# Altium PCB sensor.PcbDoc
Units mm, origin at the board's own origin, x right, y up, seen from the top; angles counter-clockwise.
Board outline 89.99 x 89.99 mm, 2 copper layers (Top Layer, Bottom Layer); 63 components, 46 nets, 188 pads, 18 vias.
Unrouted connection lines stored in the file: 77.
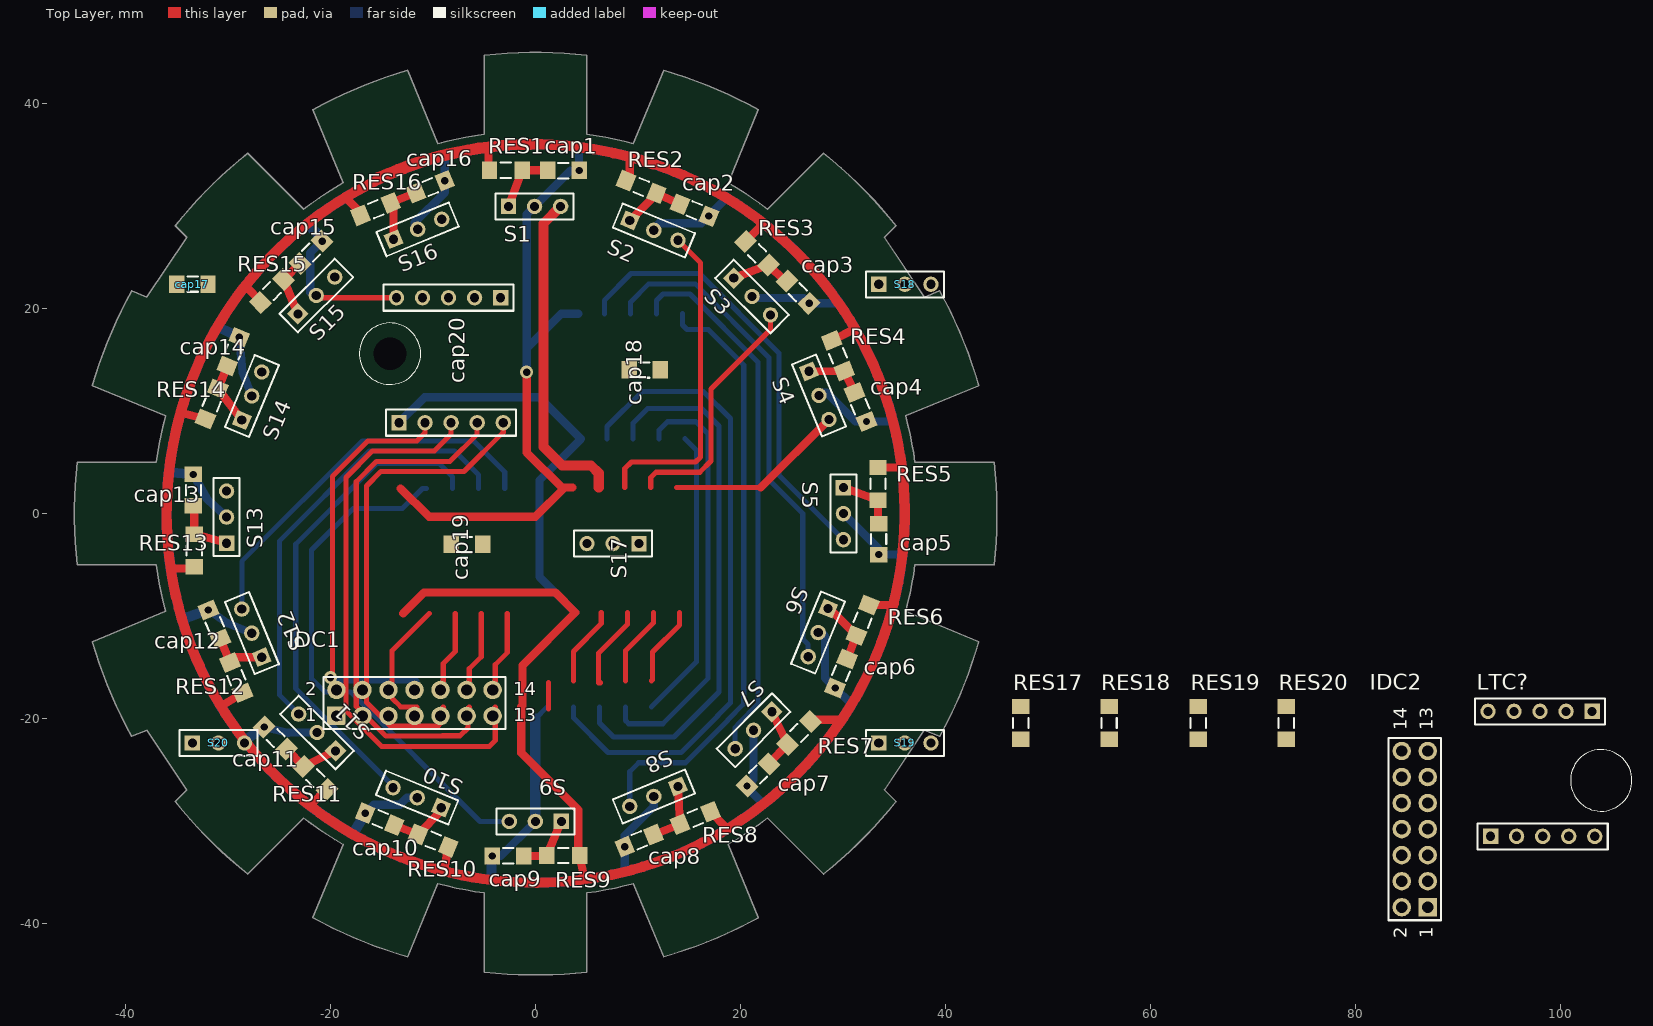
[diagram p0: Top Layer view]
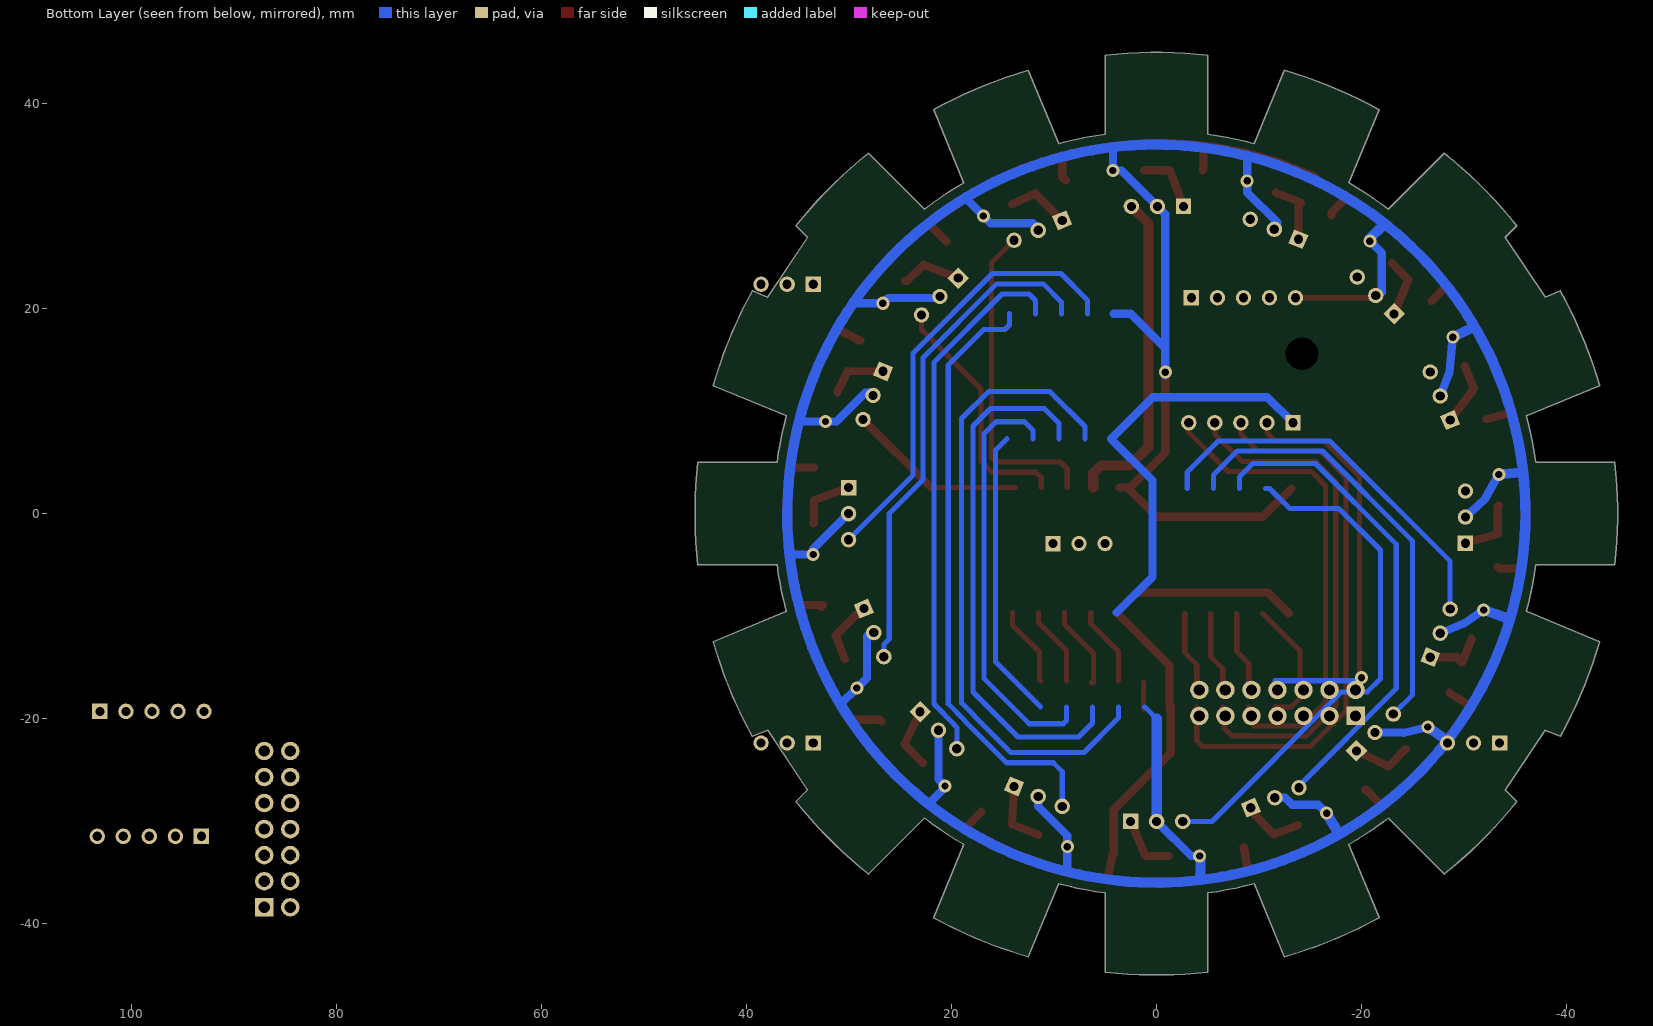
[diagram p1: Bottom Layer view, seen from below]
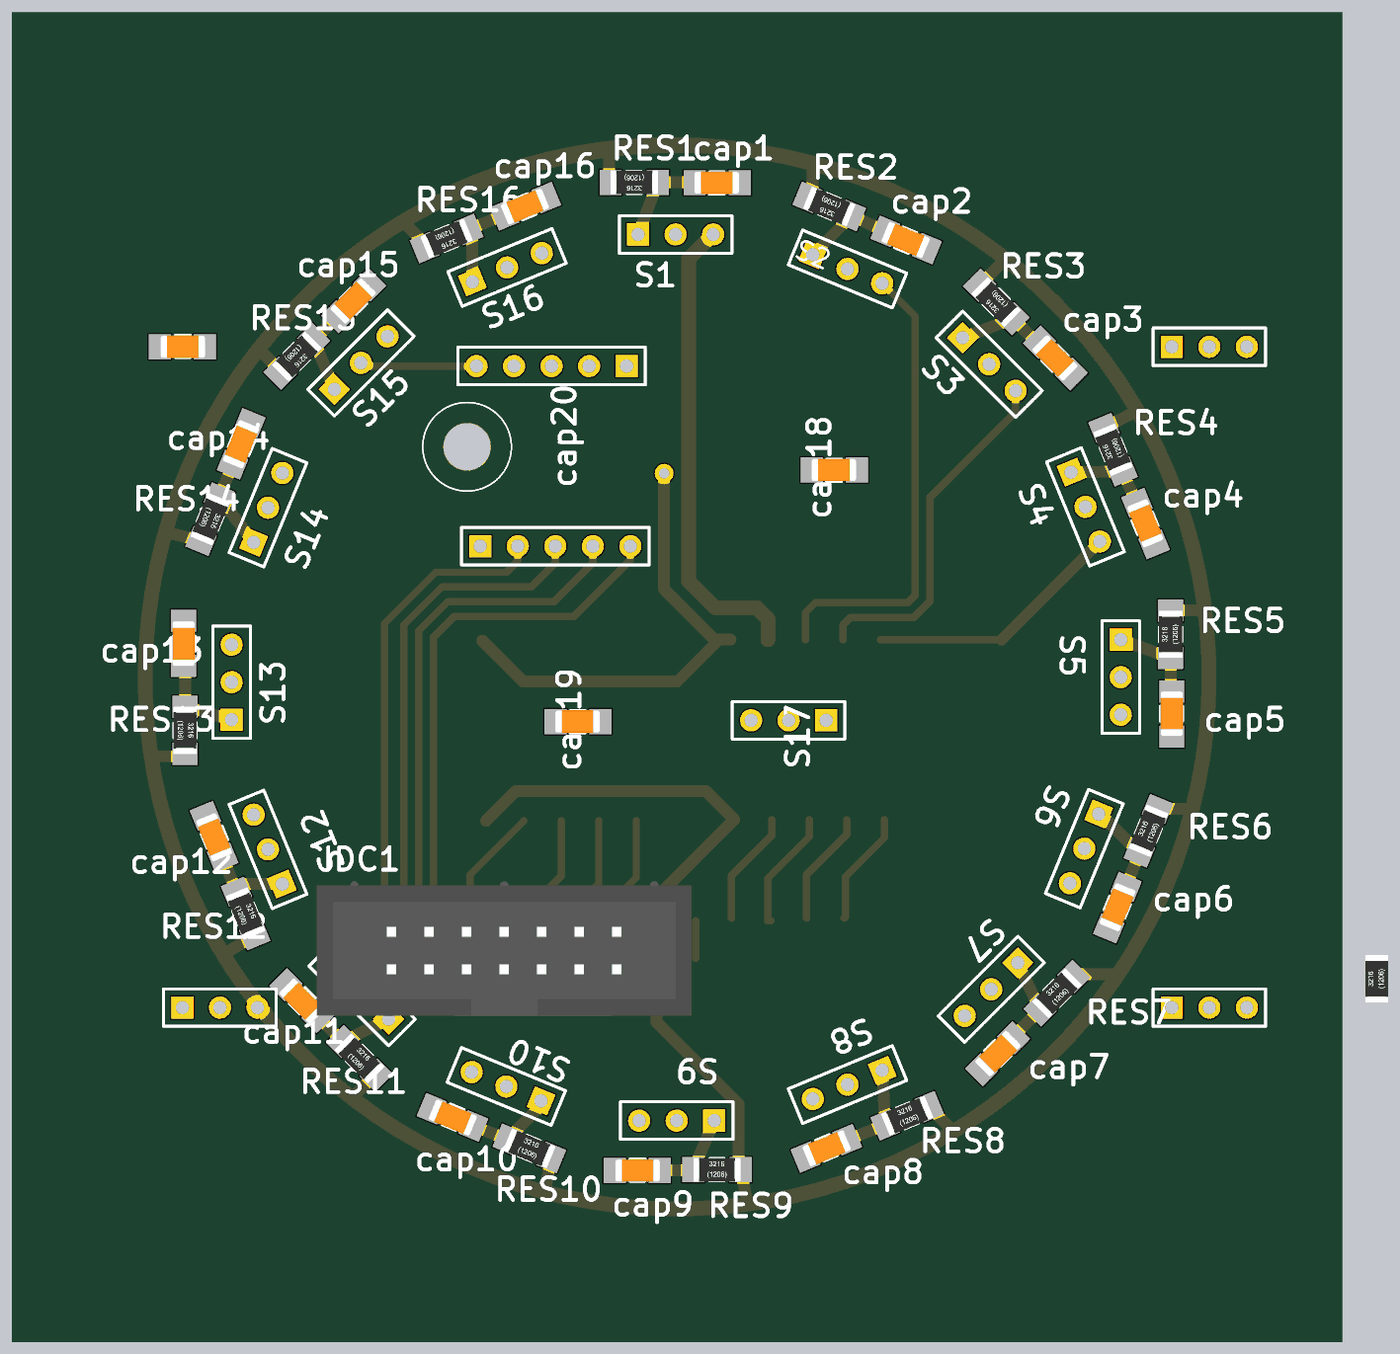
[diagram p2: 3D render of the assembled board from above, using the file's embedded part models]

## Layer stack, top to bottom
Top Solder: solder mask 0.0102, Solder Resist, Dk 3.5
Top Layer: signal copper 0.0356
Dielectric 1: dielectric 0.32, FR-4, Dk 4.8
Bottom Layer: signal copper 0.0356
Bottom Solder: solder mask 0.0102, Solder Resist, Dk 3.5

## Board outline
-34.024,-26.953 -37.922,-21.12 -39.404,-21.734 cw(c0,0) -43.231,-12.495 -36.097,-9.54 cw(c0,0) -37,-5 -44.721,-5 cw(c0,0) -44.721,5 -37,5 cw(c0,0) -36.097,9.54 -43.231,12.495 cw(c0,0) -39.404,21.734 -37.922,21.12 -34.024,26.953 -35.158,28.087 cw(c0,0) -28.087,35.158 -22.627,29.698 cw(c0,0) -18.779,32.27 -21.734,39.404 cw(c0,0) -12.495,43.231 -9.54,36.097 cw(c0,0) -5,37 -5,44.721 cw(c0,0) 5,44.721 5,37 cw(c0,0) 9.54,36.097 12.495,43.231 cw(c0,0) 21.734,39.404 18.779,32.27 cw(c0,0) 22.627,29.698 28.087,35.158 cw(c0,0) 35.158,28.087 34.024,26.953 37.922,21.12 39.404,21.734 cw(c0,0) 43.231,12.495 36.097,9.54 cw(c0,0) 37,5 44.721,5 cw(c0,0) 44.721,-5 37,-5 cw(c0,0) 36.097,-9.54 43.231,-12.495 cw(c0,0) 39.404,-21.734 37.922,-21.12 34.024,-26.953 35.158,-28.087 cw(c0,0) 28.087,-35.158 22.627,-29.698 cw(c0,0) 18.779,-32.27 21.734,-39.404 cw(c0,0) 12.495,-43.231 9.54,-36.097 cw(c0,0) 5,-37 5,-44.721 cw(c0,0) -5,-44.721 -5,-37 cw(c0,0) -9.54,-36.097 -12.495,-43.231 cw(c0,0) -21.734,-39.404 -18.779,-32.27 cw(c0,0) -22.627,-29.698 -28.087,-35.158 cw(c0,0) -35.158,-28.087

## Design rules (kind name [scope] priority, off if disabled: settings)
Clearance [All] p1: gap=0.5 ignorepadtopadclearanceinfootprint=FALSE
PolygonConnect [All] p1: connectstyle=Relief reliefconductorwidth=0.254 reliefentries=4 polygonreliefangle="90 Angle" airgapwidth=0.254
RoutingVias [All] p1: holewidth=0.711 width=1.27 viastyle="Through Hole" minholewidth=0.711 minwidth=1.27 maxholewidth=0.711 maxwidth=1.27
SolderMaskExpansion [All] p1: expansion=0.102
Width [All] p1: maxlimit=2 minlimit=0.4 preferedwidth=0.8
30 further rules are at their usual default settings.

## Components (designator, comment, footprint, x,y, rotation, side; value= is the part's Value field where it differs from the comment)
cap1 "smd" "Cap SMD" 2.718,33.477 r180 top
cap2 "smd" "Cap SMD" 15.5,29.6 r157.5 top
cap3 "smd" "Cap SMD" 25.6,21.6 r135 top
cap4 "smd" "Cap SMD" 31.7,10.4 r112.5 top
cap5 "smd" "Cap SMD" 33.479,-2.5 r90 top
cap6 "smd" "Cap SMD" 29.8,-15.6 r67.5 top
cap7 "smd" "Cap SMD" 21.7,-25.5 r45 top
cap8 "smd" "Cap SMD" 10.1,-31.9 r22.5 top
cap9 "smd" "Cap SMD" -2.7,-33.4 r0 top
cap10 "smd" "Cap SMD" -15.2,-29.8 r337.5 top
cap11 "smd" "Cap SMD" -25.4,-21.9 r315 top
cap12 "smd" "Cap SMD" -31.338,-10.8 r292.5 top
cap13 "smd" "Cap SMD" -33.4,2.3 r270 top
cap14 "smd" "Cap SMD" -29.5,15.8 r247.5 top
cap15 "smd" "Cap SMD" -21.9,25.5 r225 top
cap16 "smd" "Cap SMD" -10.269,31.884 r202.5 top
cap17 "smd" "Cap SMD" -33.479,22.37 r0 top locked
cap18 "smd" "Cap SMD" 10.643,14.031 r180 top
cap19 "smd" "Cap SMD" -6.7,-3 r180 top
cap20 "smd" "LTC TAK" -7.1,15.6 r180 top
IDC1 "IDC 2X7" "IDC 2X7" -11.557,-18.846 r0 top
IDC2 "IDC 2X7" "IDC 2X7" 86.137,-30.52 r90 top
LTC? "LTC TAK" "LTC TAK" 96.837,-26.02 r0 top
RES1 "SMD" "Resistor SMD 1206" -2.9,33.5 r180 top
RES2 "SMD" "Resistor SMD 1206" 10.3,31.872 r157.5 top
RES3 "SMD" "Resistor SMD 1206" 21.6,25.4 r135 top
RES4 "SMD" "Resistor SMD 1206" 29.5,15.4 r112.5 top
RES5 "SMD" "Resistor SMD 1206" 33.4,2.9 r90 top
RES6 "SMD" "Resistor SMD 1206" 31.9,-10.4 r67.5 top
RES7 "SMD" "Resistor SMD 1206" 25.7,-21.4 r45 top
RES8 "SMD" "Resistor SMD 1206" 15.57,-29.693 r22.5 top
RES9 "SMD" "Resistor SMD 1206" 2.7,-33.349 r0 top
RES10 "SMD" "Resistor SMD 1206" -10,-31.9 r337.5 top
RES11 "SMD" "Resistor SMD 1206" -21.5,-25.8 r315 top
RES12 "SMD" "Resistor SMD 1206" -29.2,-16 r292.5 top
RES13 "SMD" "Resistor SMD 1206" -33.3,-3.6 r270 top
RES14 "SMD" "Resistor SMD 1206" -31.6,10.7 r247.5 top
RES15 "SMD" "Resistor SMD 1206" -25.73,21.717 r225 top
RES16 "SMD" "Resistor SMD 1206" -15.6,29.698 r202.5 top
RES17 "SMD" "Resistor SMD 1206" 47.337,-20.42 r90 top
RES18 "SMD" "Resistor SMD 1206" 55.937,-20.42 r90 top
RES19 "SMD" "Resistor SMD 1206" 64.637,-20.42 r90 top
RES20 "SMD" "Resistor SMD 1206" 73.237,-20.42 r90 top
S1 "Header 3" HDR1X3 -2.642,29.972 r0 top
S2 "Header 3" HDR1X3 9.185,28.607 r337.5 top
S3 "Header 3" HDR1X3 19.32,22.98 r315 top
S4 "Header 3" HDR1X3 26.663,13.878 r292.5 top
S5 "Header 3" HDR1X3 30.023,2.54 r270 top
S6 "Header 3" HDR1X3 28.531,-9.261 r247.5 top
S7 "Header 3" HDR1X3 23.056,-19.337 r225 top
S8 "Header 3" HDR1X3 13.878,-26.612 r202.5 top
S9 "Header 3" HDR1X3 2.515,-30.023 r180 top
S10 "Header 3" HDR1X3 -9.21,-28.683 r157.5 top
S11 "Header 3" HDR1X3 -19.522,-23.15 r135 top
S12 "Header 3" HDR1X3 -26.714,-14.005 r112.5 top
S13 "Header 3" HDR1X3 -30.147,-2.88 r90 top
S14 "Header 3" HDR1X3 -28.658,9.128 r67.5 top
S15 "Header 3" HDR1X3 -23.19,19.482 r45 top
S16 "Header 3" HDR1X3 -13.853,26.765 r22.5 top
S17 "Header 3" HDR1X3 10.088,-2.921 r180 top
S18 "Header 3" HDR1X3 33.479,22.37 r0 top locked
S19 "Header 3" HDR1X3 33.479,-22.37 r0 top locked
S20 "Header 3" HDR1X3 -33.479,-22.37 r0 top locked

## Footprints (in the part's own frame and the unit in brackets; to place one, negate y for a bottom-side part, rotate by r counter-clockwise, add the part's x,y. Pads: shape width x height; smd on the part's side, far side on the other; paste and mask are expansions set on the pad)
"Cap SMD" [mm]
  rect 1.5x1.7 smd: 1(-1.525,0) 2(1.525,0)
  silkscreen extent -0.47,-0.72 0.53,0.78, body extent -1.49,-0.76 1.55,0.76, height 0.75
HDR1X3 [mm] "Connector; Header; 3 Position"
  rect 1.5x1.5 hole 0.9: 1(0,0)
  round 1.5 hole 0.9: 2(2.54,0) 3(5.08,0)
  silkscreen extent -1.27,-1.27 6.35,1.27
"IDC 2X7" [mm]
  rect 1.8x1.8 hole 1.1 unplated: 1(-7.874,-0.889)
  round 1.8 hole 1.1 unplated: 2(-7.874,1.651) 3(-5.334,-0.889) 4(-5.334,1.651) 5(-2.794,-0.889) 6(-2.794,1.651) 7(-0.254,-0.889) 8(-0.254,1.651) 9(2.286,-0.889) 10(2.286,1.651) 11(4.826,-0.889) 12(4.826,1.651) 13(7.366,-0.889) 14(7.366,1.651)
  silkscreen extent -9.14,-2.16 8.64,2.92, body extent -12.83,-4.06 12.55,5.04, height 9.3
"LTC TAK" [mm]
  rect 1.5x1.5 hole 0.9: 1(6.223,6.731) 6(-3.683,-5.461)
  round 1.5 hole 0.9: 2(3.683,6.731) 3(1.143,6.731) 4(-1.397,6.731) 5(-3.937,6.731) 7(-1.143,-5.461) 8(1.397,-5.461) 9(3.937,-5.461) 10(6.477,-5.461)
  round 1.524 hole 3.2: 2(7.112,0)
  silkscreen extent -5.21,-6.73 10.11,8
"Resistor SMD 1206" [mm]
  rect 1.5x1.7 smd: 1(-1.6,0) 2(1.6,0)
  silkscreen extent -0.5,-0.75 0.5,0.75, body extent -1.6,-0.8 1.6,0.8, height 0.55

## Part data
cap1 cap2 cap3 cap4 cap5 cap6 cap7 cap8 cap9 cap10 cap11 cap12 cap13 cap14 cap15 cap16 cap17 cap18 cap19 cap20: library part "Cap SMD"
RES1 RES2 RES3 RES4 RES5 RES6 RES7 RES8 RES9 RES10 RES11 RES12 RES13 RES14 RES15 RES16 RES17 RES18 RES19 RES20: library part "Res SMD"
S1 S2 S3 S4 S5 S6 S7 S8 S9 S10 S11 S12 S13 S14 S15 S16 S17 S18 S19 S20: "Header, 3-Pin", LatestRevisionDate=17-Jul-2002, LatestRevisionNote="Re-released for DXP Platform.", Publisher="Altium Limited"

## Via types
v1: diameter 1.27, hole 0.711, Top Layer to Bottom Layer, 18 vias

## Nets (pads, with @x,y where several pads share a name; then routed paths per layer and width w, separated by ;. In a path a pad name is that pad's centre, name@x,y a point inside that pad or via, vN(x,y) a via of type N, cw(c..) or ccw(c..) an arc to the next point about the centre after c; other vN are vias at no path point)
CR1: cap1.2 RES1.1 S1.1 | length 6.3
  Top Layer w0.8: S1.1 RES1.1 1.17,33.5 cap1.2
CR2: cap2.2 RES2.1 S2.1 | length 6.3
  Top Layer w0.8: S2.1 11.778,31.2 RES2.1 cap2.2
CR3: cap3.2 RES3.1 S3.1 | length 6.1
  Top Layer w0.8: S3.1 RES3.1 24.322,22.678 cap3.2
CR4: cap4.2 RES4.1 S4.1 | length 5.8
  Top Layer w0.8: S4.1 RES4.1 cap4.2
CR5: cap5.2 RES5.1 S5.1 | length 5.9
  Top Layer w0.8: S5.1 RES5.1 33.4,-0.896 cap5.2
CR6: cap6.2 RES6.1 S6.1 | length 6.3
  Top Layer w0.8: S6.1 28.671,-9.261 RES6.1 cap6.2
CR7: cap7.2 RES7.1 S7.1 | length 6
  Top Layer w0.8: cap7.2@22.799,-24.301 RES7.1 S7.1
CR8: cap8.2 RES8.1 S8.1 | length 6.5
  Top Layer w0.8: cap8.2 RES8.1 S8.1
CR9: cap9.2 RES9.1 S9.1 | length 5.9
  Top Layer w0.8: cap9.2 1.049,-33.4 RES9.1 S9.1
CR10: cap10.2 RES10.1 S10.1 | length 6
  Top Layer w0.8: cap10.2 RES10.1 -9.21,-29.02 S10.1
CR11: cap11.2 RES11.1 S11.1 | length 5.9
  Top Layer w0.8: cap11.2 RES11.1 S11.1
CR12: cap12.2 RES12.1 S12.1 | length 5.8
  Top Layer w0.8: cap12.2 RES12.1 -29.296,-14.005 S12.1
CR13: cap13.2 RES13.1 S13.1 | length 6.1
  Top Layer w0.8: cap13.2 -33.3,0.675 RES13.1 S13.1
CR14: cap14.2 RES14.1 S14.1 | length 6.2
  Top Layer w0.8: cap14.2 RES14.1 S14.1
CR15: cap15.2 RES15.1 S15.1 | length 5.9
  Top Layer w0.8: S15.1 RES15.1 -24.552,22.848 cap15.2
CR16: cap16.2 RES16.1 S16.1 | length 6.3
  Top Layer w0.8: S16.1 -13.853,30.042 RES16.1 cap16.2
CR17: cap17.2 RES17.1 S17.1 | length 38
  Bottom Layer w0.5: -28.658,-9.312 -28.658,-4.656 -16.902,7.1 -6.06,7.1 -3.017,4.057 -3.017,2.461
CR18: cap18.2 RES18.1 S18.1 | length 43
  Bottom Layer w0.5: -23.114,-19.558 -25,-17.672 -25,-14.738 -24.984,-14.722 -24.984,-13.289 -25,-13.273 -25,-2.7 -16.2,6.1 -7.9,6.1 -5.557,3.757 -5.557,2.461
CR19: cap19.2 RES19.1 S19.1 | length 47.9
  Bottom Layer w0.5: -13.904,-26.739 -13.904,-26.558 -23.4,-17.062 -23.4,-2.978 -15.522,4.9 -9.41,4.9 -8.097,3.587 -8.097,2.461
CR20: cap20.2 RES20.1 S20.1 | length 51.3
  Bottom Layer w0.5: -10.637,2.461 -11.039,2.461 -13,0.5 -17.8,0.5 -21.854,-3.554 -21.854,-16.105 -20.574,-17.385 -18.062,-17.385 -5.424,-30.023 -2.565,-30.023
GND: cap1.1 cap2.1 cap3.1 cap4.1 cap5.1 cap6.1 cap7.1 cap8.1 cap9.1 cap10.1 cap11.1 cap12.1 cap13.1 cap14.1 cap15.1 cap16.1 cap17.1 cap18.1 cap19.1 cap20.1 IDC1.9 IDC1.10 IDC2.9 IDC2.10 LTC?.10 S1.2 S2.2 S3.2 S4.2 S5.2 S6.2 S7.2 S8.2 S9.2 S10.2 S11.2 S12.2 S13.2 S14.2 S15.2 S16.2 S17.2 S18.2 S19.2 S20.2 | length 430.5
  Top Layer w0.5: S15.2@-21.177,21.061 -13.577,21.061
  Top Layer w0.8: S15.2 S15.2@-21.177,21.061 ; -13.177,2.461 -10.416,-0.3 0,-0.3 2.84,2.54 ; v1(-0.875,13.803) -0.875,5.975 2.56,2.54 2.84,2.54 ; 3.611,2.54 2.84,2.54
  Bottom Layer w0.5: -0.025,-20.015 1.143,-18.846
  Bottom Layer w0.8: v1(-33.4,3.825) -32.031,1.4 S13.2 ; v1(-31.922,-9.391) -30.039,-10.7 S12.2 ; v1(-28.916,17.209) -28.588,13.821 S14.2 ; v1(-26.478,-20.822) -24.1,-21.382 S11.2 ; S15.2@-21.394,21.442 -21.274,21.563 -21.989,21.563 -21.989,25.411 v1(-20.822,26.578) ; v1(-16.609,-29.216) -15.782,-28.389 -13.22,-28.389 -12.542,-27.711 S10.2 ; S16.2 -11.8,28.031 -11.8,28.402 -8.86,31.341 v1(-8.86,32.467) -8.86,34.849 -8.802,34.907 ; v1(-4.225,-33.4) -3.403,-33.4 S9.2 ; v1@-0.875,13.5 v1(-0.875,13.803) -0.875,16.125 ; 4.166,19.492 2.492,19.492 -0.875,16.125 ; 4.225,35.751 4.243,35.734 v1(4.243,33.477) 3.404,33.477 S1.2 -0.875,29.199 -0.875,16.125 ; 8.567,-34.966 8.691,-34.842 v1(8.691,-32.484) 8.691,-31.384 11.532,-28.543 S8.2 ; S2.2@11.532,27.829 12.027,28.324 16.176,28.324 v1(16.88,29.028) 18.537,30.685 18.537,30.861 ; S3.2 21.262,21.038 26.162,21.038 v1(26.678,20.522) 29.426,20.522 29.516,20.611 ; S7.2 21.26,-25.94 v1(20.622,-26.578) 20.622,-26.703 22.233,-28.314 ; S6.2 27.896,-11.608 28.237,-11.949 28.237,-16.029 v1(29.216,-17.009) 30.744,-18.537 30.861,-18.537 ; S4.2 27.913,11.809 28.391,11.809 31.209,8.991 v1(32.284,8.991) 34.852,8.991 34.862,8.981 ; S5.2 33.479,-3.456 v1(33.479,-3.994) 35.664,-3.994 35.766,-4.096
  Bottom Layer w1: -35.5,4 v1(-33.4,3.825) ; -34.162,-10.18 v1(-31.922,-9.391) ; -30.754,18.1 v1(-28.916,17.209) ; -28.2,-22 v1(-26.478,-20.822) ; -22.079,28.1 -20.822,26.843 v1(-20.822,26.578) ; -17.7,-31.1 v1(-16.609,-29.216) ; v1(-4.225,-33.4) -4.3,-33.475 -4.3,-35.742 ; S9.2 -0.025,-20.015 ; -4.3,-35.742 cw(c0,0) -8.802,34.907 cw(c0,0) 4.225,35.751 cw(c0,0) 18.537,30.861 cw(c0,0) 29.516,20.611 cw(c0,0) 34.862,8.981 cw(c0,0) 36,0 36,-1.269 35.977,-1.292 cw(c0,0) 35.766,-4.096 cw(c0,0) 30.861,-18.537 cw(c0,0) 22.233,-28.314 cw(c0,0) 8.567,-34.966 cw(c0,0) -4.3,-35.742
L17: LTC?.9 S17.3 | length 59
  Bottom Layer w0.5: 9.185,-28.556 9.185,-25.169 10.054,-24.3 14.609,-24.3 18.76,-20.149 18.76,-20.097 20.3,-18.557 20.3,14.5 16.848,17.952 14.774,17.952 14.326,18.4 14.326,19.492
L18: LTC?.8 S18.3 | length 52.9
  Bottom Layer w0.5: 11.786,19.492 11.786,20.786 12.414,21.414 15.063,21.414 21.704,14.773 21.704,-18.568 19.76,-20.511 19.76,-20.564 19.464,-20.86 19.464,-22.929
L19: LTC?.7 S19.3 | length 49.1
  Bottom Layer w0.5: 9.246,19.492 9.246,20.624 11.036,22.414 15.572,22.414 22.75,15.236 22.75,3.319 26.059,0.01 26.059,-12.229 26.587,-12.757 26.587,-13.954
L20: LTC?.6 S20.3 | length 43.4
  Bottom Layer w0.5: 6.706,19.492 6.706,20.806 9.314,23.414 15.986,23.414 23.75,15.65 23.75,3.733 30.023,-2.54
S1: IDC1.12 S1.3
S2: IDC1.14 S2.3
S3: IDC1.11 S3.3
S4: IDC1.13 S4.3
S5: IDC1.6 S5.3
S6: IDC1.4 S6.3
S7: IDC1.2 S7.3
S8: IDC1.5 S8.3
S9: IDC1.3 S9.3 | length 12.6
  Top Layer w0.5: -11.557,-18.846 -13.154,-18.846 -14,-18 -14,-13.369 -10.383,-9.752 -10.383,-9.731
S10: IDC1.1 S10.3 | length 7.1
  Top Layer w0.5: -9.017,-16.306 -9.017,-14.628 -7.843,-13.454 -7.843,-9.731
S11: IDC2.12 S11.3 | length 7.1
  Top Layer w0.5: -6.477,-16.306 -6.477,-15.132 -5.303,-13.958 -5.303,-9.731
S12: IDC2.14 S12.3 | length 7.1
  Top Layer w0.5: -3.937,-16.306 -3.937,-14.737 -2.763,-13.563 -2.763,-9.731
S13: IDC2.11 S13.3 | length 40.1
  Top Layer w0.5: v1@-19.803,-16.119 -19.803,3.64 -16.343,7.1 -11.566,7.1 -10.783,7.883 -10.783,8.869
  Bottom Layer w0.5: v1(-20,-16) -19.694,-16.306 -11.557,-16.306
S14: IDC2.13 S14.3 | length 55.4
  Top Layer w0.5: -8.243,8.869 -8.243,7.743 -9.886,6.1 -15.928,6.1 -18.5,3.528 -18.5,-19.228 -15.028,-22.7 -4.496,-22.7 -3.937,-22.141 -3.937,-18.846
S15: IDC2.6 S15.3 | length 51.3
  Top Layer w0.5: -6.477,-18.846 -6.6,-18.969 -6.6,-20.9 -7.368,-21.668 -9.058,-21.668 -9.089,-21.7 -14.614,-21.7 -17.5,-18.814 -17.5,3.114 -15.514,5.1 -8.346,5.1 -5.703,7.743 -5.703,8.869
S16: IDC2.4 S16.3 | length 47.5
  Top Layer w0.5: -9.017,-18.846 -9.017,-20.213 -9.504,-20.7 -14.2,-20.7 -16.5,-18.4 -16.5,2.7 -15.1,4.1 -7,4.1 -3.163,7.937 -3.163,8.869
S17: IDC2.2 LTC?.2 | length 17.6
  Top Layer w0.5: 13.771,2.54 21.962,2.54
  Top Layer w0.8: 21.962,2.54 28.607,9.185
S18: IDC2.5 LTC?.3 | length 24.2
  Top Layer w0.5: 11.231,2.54 11.231,3.531 11.74,4.04 16.018,4.04 17.1,5.122 17.1,12.162 22.912,17.973 22.912,19.388
S19: IDC2.3 LTC?.4 | length 31.8
  Top Layer w0.5: 8.691,2.54 8.691,4.391 9.34,5.04 15.604,5.04 16.1,5.536 16.1,24.441 13.878,26.663
S20: IDC2.1 LTC?.5 | length 32
  Top Layer w1: 2.438,29.972 0.771,28.305 0.771,6.529 2.6,4.7 5.4,4.7 6.151,3.949 6.151,2.54
VCC: cap20.6 cap20.7 cap20.8 cap20.9 IDC1.7 IDC1.8 IDC2.7 IDC2.8 LTC?.1 RES1.2 RES2.2 RES3.2 RES4.2 RES5.2 RES6.2 RES7.2 RES8.2 RES9.2 RES10.2 RES11.2 RES12.2 RES13.2 RES14.2 RES15.2 RES16.2 RES17.2 RES18.2 RES19.2 RES20.2 | length 439.8
  Top Layer w0.8: -35.4,-5.354 -33.454,-5.354 RES13.2 RES13.2@-33.4,-5.3 ; -34.5,9.8 RES14.2 ; -30.42,-18.6 RES12.2 ; -28.1,22 RES15.2@-26.862,20.762 ; -21.8,-28.3 -20.431,-26.931 RES11.2 ; -18.4,30.7 -17.078,29.378 RES16.2 ; -12.923,-9.731 -10.9,-7.708 1.921,-7.708 3.865,-9.652 -1.28,-14.797 -1.28,-18.846 -1.28,-19.04 ; -8.9,-34.6 RES10.2 ; -4.6,35.5 -4.6,33.6 RES1.2 ; -1.397,-18.846 -1.397,-23.338 4.165,-28.9 4.165,-33.214 RES9.2 4.725,-35.4 ; RES2.2 9.185,32.848 9.185,34.5 ; RES8.2 18.568,-30.6 18.7,-30.6 ; RES3.2 21.9,27.963 21.9,28.1 ; RES7.2 27,-20.1 29.5,-20.1 ; RES4.2@29.078,16.878 RES4.2 31.151,18.045 ; RES6.2@32.69,-9.1 RES6.2 34.6,-8.922 ; RES5.2 33.41,4.51 35.4,4.51
  Top Layer w1: -35.977,-1.295 cw(c0,0) -33.666,12.752 cw(c0,0) -28.519,21.969 ; -15.342,32.805 cw(c-0.378,0.062) 5.657,35.553 ; -14.964,32.743 ccw(c0,0) -28.519,21.969 ; 11.463,34.059 ccw(c-0.378,0.062) 5.657,35.553 ; 12.56,33.738 cw(c0,0) 24.276,26.583 cw(c0,0) 31.151,18.045 cw(c0,0) 32.547,15.385 cw(c0,0) 35.969,1.503 cw(c0,0) 33.694,-12.676 cw(c0,0) 26.391,-24.485 cw(c0,0) 15.01,-32.722 ; 16.265,-32.116 cw(c0,0) -9.207,-34.803 cw(c0,0) -32.732,-14.987 cw(c0,0) -28.519,21.969 ; 28.194,22.386 ccw(c0,0) 5.657,35.553 ; -28.519,21.969 cw(c0,0) 5.657,35.553
  Bottom Layer w0.8: -13.323,8.869 -10.849,11.343 0.377,11.343 4.42,7.3 0.377,3.257 0.377,-6.164 3.865,-9.652
pads on no net: cap20.3 cap20.4 cap20.5 cap20.10
copper on no net: | length 220.3
  Top Layer w0.5: 1.26,-19.04 1.26,-16.5 ; 3.683,-16.306 3.683,-13.439 6.405,-10.717 6.405,-9.652 ; 6.34,-16.5 6.133,-16.5 6.133,-13.616 8.945,-10.804 8.945,-9.652 ; 8.763,-16.306 8.763,-13.368 11.485,-10.646 11.485,-9.652 ; 11.303,-16.306 11.4,-16.209 11.4,-13.507 14.025,-10.882 14.025,-9.652
  Bottom Layer w0.5: 3.683,-18.846 3.683,-19.914 7.069,-23.3 14.195,-23.3 17.76,-19.735 17.76,-19.683 19,-18.443 19,9.286 16.386,11.9 10.366,11.9 6.96,8.494 6.96,7.3 ; 6.223,-18.846 6.223,-20.423 7.596,-21.796 13.504,-21.796 17.9,-17.4 17.9,8.547 16.187,10.26 10.942,10.26 9.5,8.818 9.5,7.3 ; 8.763,-18.846 8.763,-20.179 9.08,-20.496 12.404,-20.496 16.8,-16.1 16.8,7.809 15.649,8.96 12.866,8.96 12.04,8.134 12.04,7.3 ; 11.303,-18.846 15.675,-14.474 15.675,6.205 14.58,7.3

## Silkscreen, mask and mechanical layers (free items; w line width, h text height)
Mechanical 1:
  circle w0: c-33.479,-22.37 r1.5
  circle w0: c-33.479,22.37 r1.5
  circle w0: c33.479,22.37 r1.5
  circle w0: c33.479,-22.37 r1.5
  lines w0: -44.721,-5 cw(c0,0) -44.721,5 -37,5 cw(c0,0) -36.097,9.54 -43.231,12.495 cw(c0,0) -39.404,21.734 -37.922,21.12 -34.024,26.953 -35.158,28.087 cw(c0,0) -28.087,35.158 -22.627,29.698 cw(c0,0) -18.779,32.27 -21.734,39.404 cw(c0,0) -12.495,43.231 -9.54,36.097 cw(c0,0) -5,37 -5,44.721 cw(c0,0) 5,44.721 5,37 cw(c0,0) 9.54,36.097 12.495,43.231 cw(c0,0) 21.734,39.404 18.779,32.27 cw(c0,0) 22.627,29.698 28.087,35.158 cw(c0,0) 35.158,28.087 34.024,26.953 37.922,21.12 39.404,21.734 cw(c0,0) 43.231,12.495 36.097,9.54 cw(c0,0) 37,5 44.721,5 cw(c0,0) 44.721,-5 37,-5 cw(c0,0) 36.097,-9.54 43.231,-12.495 cw(c0,0) 39.404,-21.734 37.922,-21.12 34.024,-26.953 35.158,-28.087 cw(c0,0) 28.087,-35.158 22.627,-29.698 cw(c0,0) 18.779,-32.27 21.734,-39.404 cw(c0,0) 12.495,-43.231 9.54,-36.097 cw(c0,0) 5,-37 5,-44.721 cw(c0,0) -5,-44.721 -5,-37 cw(c0,0) -9.54,-36.097 -12.495,-43.231 cw(c0,0) -21.734,-39.404 -18.779,-32.27 cw(c0,0) -22.627,-29.698 -28.087,-35.158 cw(c0,0) -35.158,-28.087 -34.024,-26.953 -37.922,-21.12 -39.404,-21.734 cw(c0,0) -43.231,-12.495 -36.097,-9.54 cw(c0,0) -37,-5 -44.721,-5

## Text inside footprints (layer, text, board x,y; h text height)
IDC1: Top Overlay "13" at -2.159,-20.243 h1.27; Top Overlay "14" at -2.159,-17.703 h1.27; Top Overlay "1" at -22.479,-20.243 h1.27; Top Overlay "2" at -22.479,-17.703 h1.27
IDC2: Top Overlay "13" at 87.534,-21.122 h1.27 r90; Top Overlay "14" at 84.994,-21.122 h1.27 r90; Top Overlay "1" at 87.534,-41.442 h1.27 r90; Top Overlay "2" at 84.994,-41.442 h1.27 r90